# EAGLE board TempSensor (EAGLE 6.3)
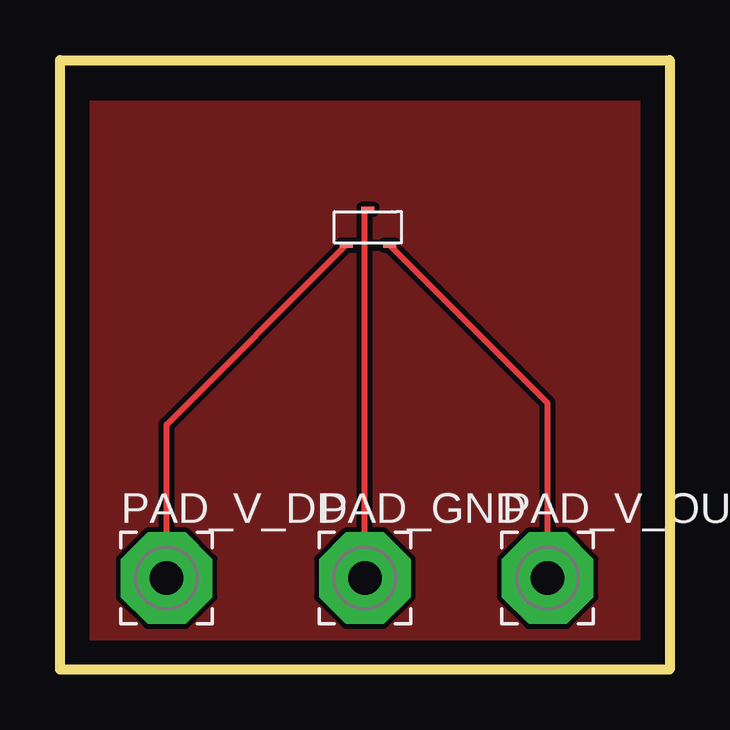
[diagram p0: board, top side]
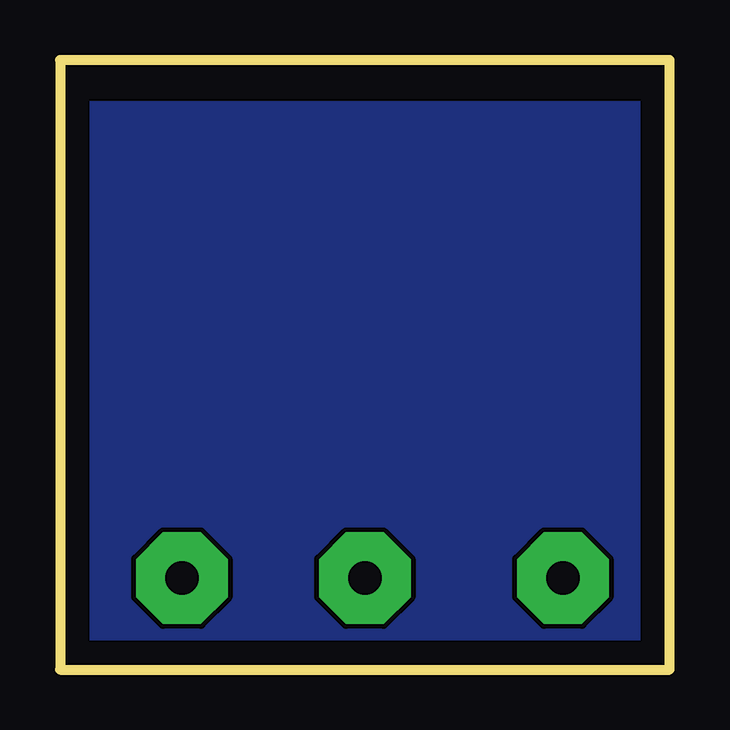
[diagram p1: board, bottom side, seen from below]

Size 25.4 x 25.4 mm. Coordinates in mm from the lower left corner, seen from the top.
Outline: 0,0 0,25.4 25.4,25.4 25.4,0 0,0
Copper layers (1*16): Top 0.035mm / dielectric 1.5mm / Bottom 0.035mm
Design rules "default": minimum track width 10mil, minimum drill 24mil, track to track 8mil, track to pad 8mil, pad to pad 8mil, via to via 8mil, smd to smd 8mil, copper to edge 40mil, drill to drill 8mil, minimum pad ring 10mil, minimum via ring 8mil, stop-mask expansion 4mil, vias tented up to drill 0mil, thermal gap 10mil

## Footprints (pad centres in the part's own frame; a part is rotated, then mirrored left to right if it is on the bottom)
3,81/1,4 = drill 1.397 pad 3.81 octagon: 1 0,0
MCP9701-SOT-23 = smd 0.54 x 0.2: GND 1.4,1.4; V_DD 0.5,-0.1; V_OUT 2.3,-0.1

## Placement (x,y rotation side)
PAD_GND  [3,81/1,4]  12.7,3.81 0 top
PAD_V_DD  [3,81/1,4]  4.45,3.81 0 top
PAD_V_OUT  [3,81/1,4]  20.32,3.81 0 top
U$1  MCP9701-SOT-23  [MCP9701-SOT-23]  11.43,17.78 0 top

## Library data of the parts
PAD_GND PAD_V_DD PAD_V_OUT = wirepad
U$1 = SolarJackets_BMS

## Nets
N$1: PAD_V_DD.1 U$1.V_DD
N$2: PAD_V_OUT.1 U$1.V_OUT
N$3: PAD_GND.1 U$1.GND

## Tracks (layer width: path | path; a pad name or v marks a point on that pad's centre or on a via)
N$1
  Top 0.254: PAD_V_DD.1 4.45,10.21 11.91,17.68 U$1.V_DD
N$2
  Top 0.254: PAD_V_OUT.1 20.32,11.1 U$1.V_OUT
N$3
  Top 0.254: U$1.GND 12.7,19.05 PAD_GND.1
S$1
  pour Bottom: 1.27,23.5 1.27,1.27 24.13,1.27 24.13,23.5
S$2
  pour Top: 24.13,23.5 1.27,23.5 1.27,1.27 24.13,1.27